# EAGLE board hub (EAGLE 8.4.3)
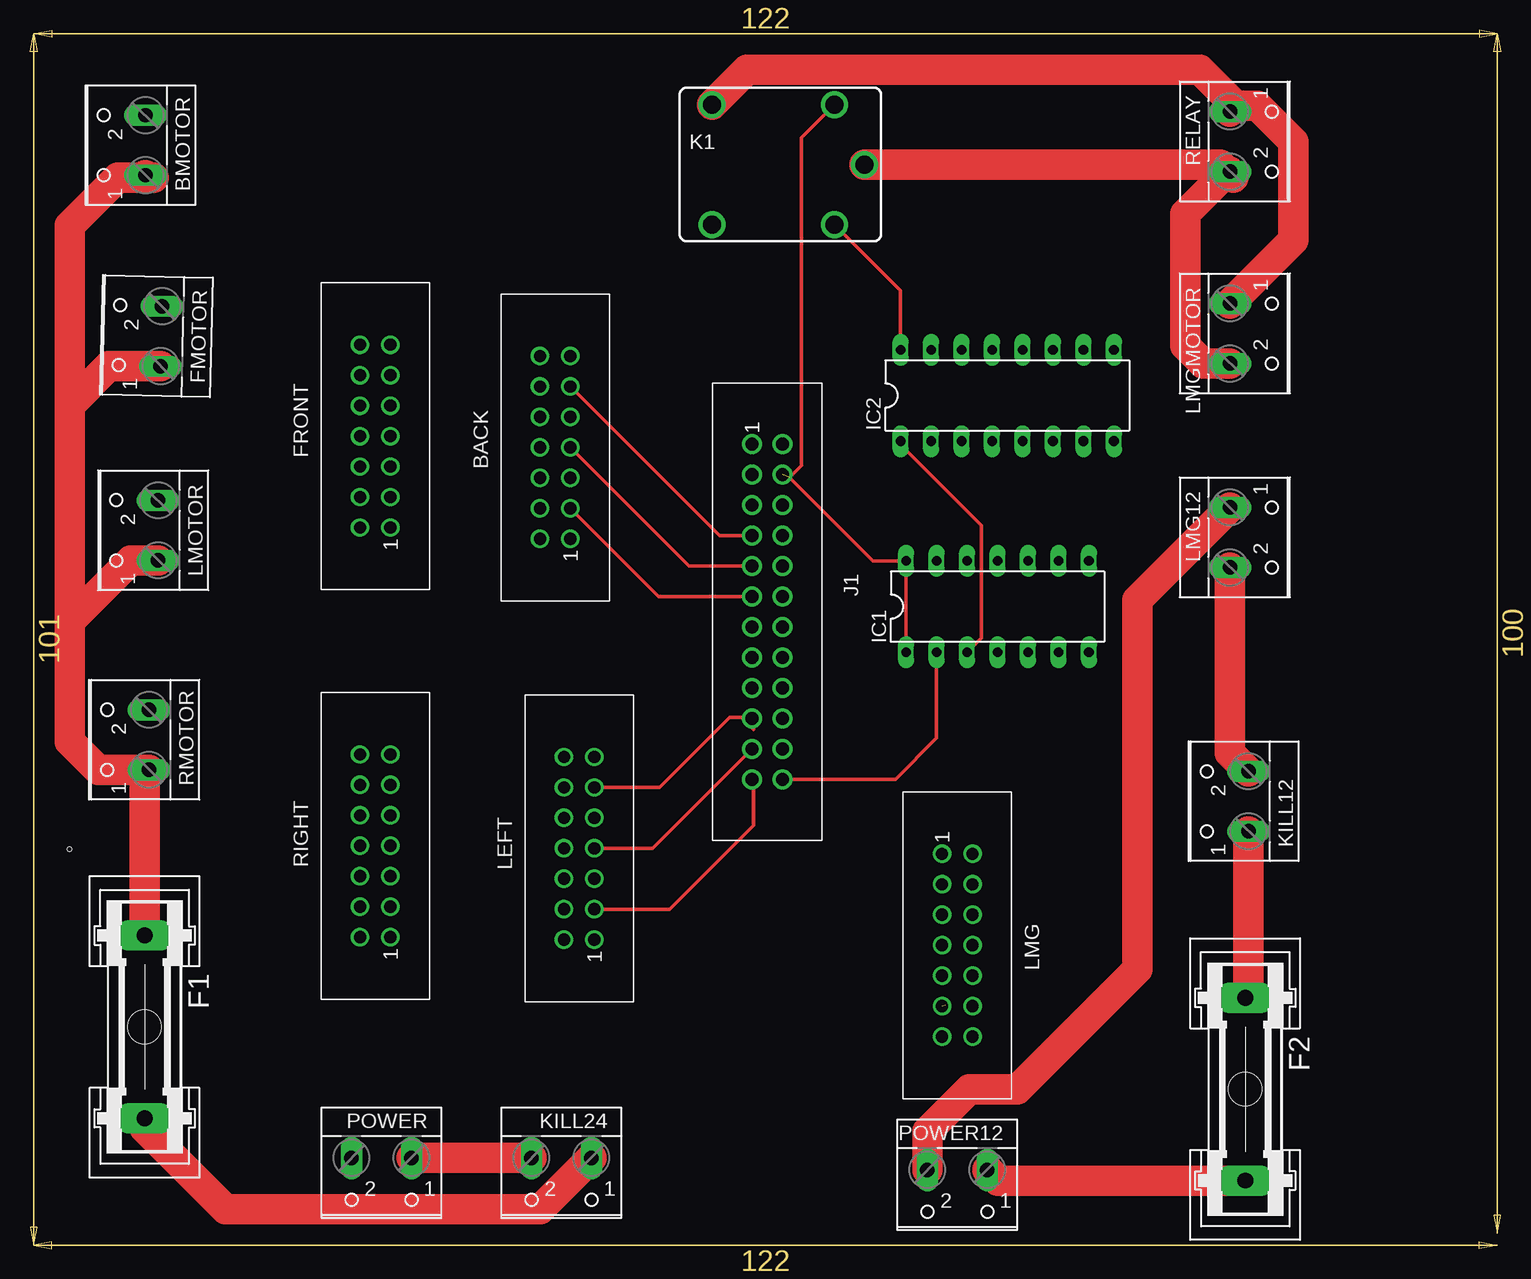
[diagram p0: board, top side]
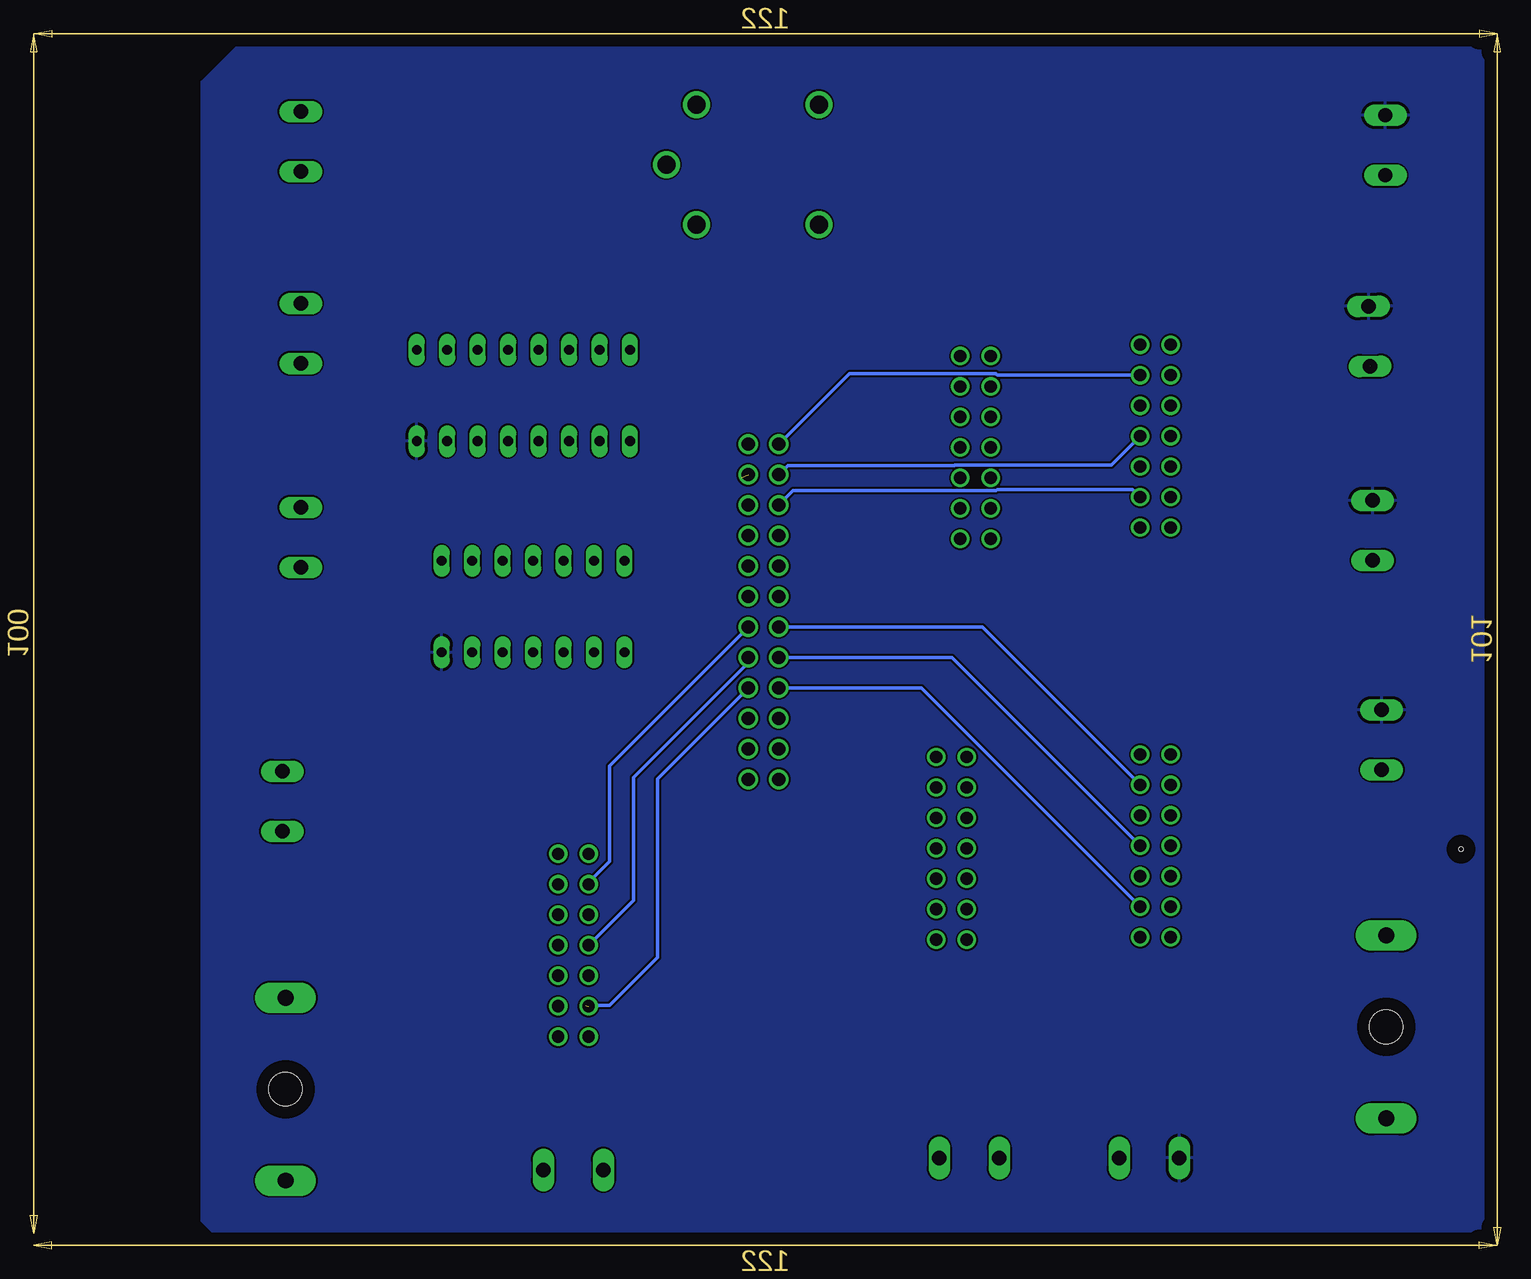
[diagram p1: board, bottom side, seen from below]

Size 122.6 x 101.6 mm. Coordinates in mm from the lower left corner, seen from the top.
Copper layers (1*16): Top 0.035mm / dielectric 1.5mm / Bottom 0.035mm
Design rules "default": minimum track width 6mil, minimum drill 0.35mm, track to track 6mil, track to pad 6mil, pad to pad 6mil, via to via 6mil, smd to smd 6mil, copper to edge 40mil, drill to drill 6mil, minimum pad ring 10mil, minimum via ring 8mil, stop-mask expansion 4mil, vias tented up to drill 0mil, thermal gap 10mil
Holes 0.35 mm at 3.3,33.3

## Footprints (pad centres in the part's own frame; a part is rotated, then mirrored left to right if it is on the bottom)
612014235121 = drill 1.02: 1 -7.62,-1.27; 2 -7.62,1.27; 3 -5.08,-1.27; 4 -5.08,1.27; 5 -2.54,-1.27; 6 -2.54,1.27; 7 0,-1.27; 8 0,1.27; 9 2.54,-1.27; 10 2.54,1.27; 11 5.08,-1.27; 12 5.08,1.27; 13 7.62,-1.27; 14 7.62,1.27
W237-102 = drill 1.194 long: 1 -2.5,-1.27; 2 2.5,-1.27
GSH15 = drill 1.321 pad 2.54 long: 1 -7.62,0; 2 7.62,0 | hole 2.794: 0,0
DIL14 = drill 0.813 long: 1 -7.62,-3.81; 2 -5.08,-3.81; 3 -2.54,-3.81; 4 0,-3.81; 5 2.54,-3.81; 6 5.08,-3.81; 7 7.62,-3.81; 8 7.62,3.81; 9 5.08,3.81; 10 2.54,3.81; 11 0,3.81; 12 -2.54,3.81; 13 -5.08,3.81; 14 -7.62,3.81
DIL16 = drill 0.813 long: 1 -8.89,-3.81; 2 -6.35,-3.81; 3 -3.81,-3.81; 4 -1.27,-3.81; 5 1.27,-3.81; 6 3.81,-3.81; 7 6.35,-3.81; 8 8.89,-3.81; 9 8.89,3.81; 10 6.35,3.81; 11 3.81,3.81; 12 1.27,3.81; 13 -1.27,3.81; 14 -3.81,3.81; 15 -6.35,3.81; 16 -8.89,3.81
61202421621 = drill 1.1: 1 -13.97,-1.27; 2 -13.97,1.27; 3 -11.43,-1.27; 4 -11.43,1.27; 5 -8.89,-1.27; 6 -8.89,1.27; 7 -6.35,-1.27; 8 -6.35,1.27; 9 -3.81,-1.27; 10 -3.81,1.27; 11 -1.27,-1.27; 12 -1.27,1.27; 13 1.27,-1.27; 14 1.27,1.27; 15 3.81,-1.27; 16 3.81,1.27; 17 6.35,-1.27; 18 6.35,1.27; 19 8.89,-1.27; 20 8.89,1.27; 21 11.43,-1.27; 22 11.43,1.27; 23 13.97,-1.27; 24 13.97,1.27
CQ1 = drill 1.5: 1 4.5,-5; 2 4.5,5; C 7,0; NC -5.7,-5; NO -5.7,5

## Placement (x,y rotation side)
BACK  [612014235121]  43.78,66.8 90 top
BMOTOR  [W237-102]  8.35,91.99 90 top
F1  [GSH15]  9.55,18.49 270 top
F2  [GSH15]  101.3,13.3 270 top
FMOTOR  [W237-102]  9.68,76.1 88.6 top
FRONT  [612014235121]  28.78,67.74 90 top
IC1  74ALS00N  [DIL14]  80.66,53.53 0 top
IC2  ULN2003AN  [DIL16]  81.47,71.13 0 top
J1  [61202421621]  61.45,53.1 270 top
K1  CQ1-12V  [CQ1]  62.55,90.39 0 top
KILL12  [W237-102]  100.3,37.3 90 top
KILL24  [W237-102]  44.3,6.3 180 top
LEFT  [612014235121]  45.78,33.38 90 top
LMG  [612014235121]  77.3,25.3 270 top
LMG12  [W237-102]  101.3,59.3 270 top
LMGMOTOR  [W237-102]  101.3,76.3 270 top
LMOTOR  [W237-102]  9.41,59.89 90 top
POWER  [W237-102]  29.3,6.3 180 top
POWER12  [W237-102]  77.3,5.3 180 top
RELAY  [W237-102]  101.3,92.3 270 top
RIGHT  [612014235121]  28.78,33.59 90 top
RMOTOR  [W237-102]  8.65,42.43 90 top

## Library data of the parts
BACK FRONT J1 LEFT LMG RIGHT = Wurth_Elektronik_Electromechanic_Wire_to_Board_Connectors_rev17b
BMOTOR FMOTOR KILL12 KILL24 LMG12 LMGMOTOR LMOTOR POWER POWER12 RELAY RMOTOR = con-wago-500; MPN: 237-102; OC_FARNELL: unknown; OC_NEWARK: 70K9898
F1 F2 = fuse; MPN: 64900001039; OC_FARNELL: 1271673; OC_NEWARK: 02P0318
IC1 = 74xx-eu
IC2 = uln-udn
K1 = relay; OC_FARNELL: unknown; OC_NEWARK: unknown

## Nets
5V: IC1.1 IC1.14 J1.4 K1.2
24V: BMOTOR.1 F1.1 FMOTOR.1 LMOTOR.1 RMOTOR.1
BIN1: BACK.3 J1.11
BIN2: BACK.11 J1.7
BPWM: BACK.7 J1.9
BRAKE: IC1.2 J1.24
COM: K1.C LMGMOTOR.2 RELAY.2
FIN1: FRONT.3 J1.5
FIN2: FRONT.11 J1.1
FPWM: FRONT.7 J1.3
GND: BMOTOR.2 FMOTOR.2 IC1.7 IC2.8 LMOTOR.2 POWER.2 RMOTOR.2
LIN1: J1.23 LEFT.3
LIN2: J1.19 LEFT.11
LMG1: J1.14 LMG.3
LMG2: J1.18 LMG.11
LMGPWM: J1.16 LMG.7
LPWM: J1.21 LEFT.7
N$1: F1.2 KILL24.1
N$3: IC1.3 IC2.1
N$4: F2.2 POWER12.1
N$6: IC2.16 K1.1
N$7: KILL12.2 LMG12.2
N$9: KILL24.2 POWER.1
N$10: K1.NC
N$11: F2.1 KILL12.1
N$13: LMG12.1 POWER12.2
N$16: J1.2
N$18: J1.6
N$19: J1.8
N$20: J1.10
N$21: J1.12
N$25: J1.20
N$26: J1.22
NO: K1.NO LMGMOTOR.1 RELAY.1
RIN1: J1.17 RIGHT.3
RIN2: J1.13 RIGHT.11
RPWM: J1.15 RIGHT.7

## Tracks (layer width: path | path; a pad name or v marks a point on that pad's centre or on a via)
5V  (1 unrouted)
  Top 0.305: IC1.1 IC1.14 70.26,57.34 63.3,64.3 64.3,65.3 64.3,92.64 K1.2
24V  (1 unrouted)
  Top 2.54: F1.1 9.55,39.56 RMOTOR.1 5.67,39.93 3.3,42.3 3.3,52.3 | 3.3,52.3 8.39,57.39 LMOTOR.1 | 3.3,52.3 3.3,70.3 | 3.3,70.3 6.57,73.57 FMOTOR.1 | 3.3,70.3 3.3,85.3 7.3,89.3 9.81,89.3 | 10.3,89.3 9.81,89.3 | 9.81,89.3 BMOTOR.1
BIN1
  Top 0.305: BACK.3 52.4,54.37 J1.11
BIN2
  Top 0.305: BACK.11 57.48,59.45 J1.7
BPWM
  Top 0.305: BACK.7 54.94,56.91 J1.9
BRAKE
  Top 0.305: IC1.2 75.58,42.58 72.13,39.13 J1.24
COM
  Top 2.54: LMGMOTOR.2 97.8,73.8 96.3,75.3 96.3,86.3 99.8,89.8 | 99.8,89.8 RELAY.2 | K1.C 99.21,90.39 99.8,89.8 | 100.3,89.3 99.8,89.8
FIN1
  Bottom 0.305: FRONT.3 30.69,63.3 41.96,63.3 42.07,63.19 58.98,63.19 J1.5
FIN2
  Bottom 0.305: FRONT.11 41.94,72.82 42.07,72.95 54.3,72.95 J1.1
FPWM
  Bottom 0.305: FRONT.7 32.46,65.33 45.49,65.33 45.52,65.3 59.41,65.3 J1.3
GND
  pour Bottom: 0.3,0.3 106.3,0.3 108.3,2.3 108.3,97.3 104.3,101.3 1.3,101.3 0.3,100.3
LIN1
  Top 0.305: LEFT.3 53.3,28.3 60.3,35.3 60.3,38.3 60.18,38.42 J1.23
LIN2
  Top 0.305: LEFT.11 52.46,38.46 58.3,44.3 59.3,44.3 60.3,43.3 60.3,44.09 J1.19
LMG1
  Bottom 0.305: J1.14 74.3,40.25 74.3,32.3 76.22,30.38 | 76.3,30.3 76.22,30.38 | 76.22,30.38 LMG.3
LMG2  (1 unrouted)
  Bottom 0.305: J1.18 70.3,39.17 70.3,24.3 74.3,20.3 76.3,20.3
LMGPWM
  Bottom 0.305: J1.16 62.72,48.88 72.3,39.3 72.3,29.03 LMG.7
LPWM
  Top 0.305: LEFT.7 51.89,33.38 J1.21
N$1
  Top 2.54: KILL24.1 42.53,3.3 16.3,3.3 9.55,10.05 F1.2
N$3
  Top 0.305: IC1.3 79.3,50.9 79.3,60.3 72.58,67.02 IC2.1
N$4
  Top 2.54: F2.2 80.69,5.68 POWER12.1
N$6
  Top 0.305: K1.1 72.58,79.86 IC2.16
N$7
  Top 2.54: LMG12.2 100.03,41.34 KILL12.2
N$9
  Top 2.54: POWER.1 KILL24.2
N$11
  Top 2.54: KILL12.1 101.57,21.19 F2.1
N$13
  Top 2.54: LMG12.1 92.3,54.07 92.3,23.3 82.3,13.3 78.3,13.3 74.8,9.8 POWER12.2
NO
  Top 2.54: LMGMOTOR.1 105.3,84.07 105.3,92.3 102.3,95.3 100.53,95.3 | 100.53,95.3 RELAY.1 | K1.NO 59.76,98.3 97.53,98.3 100.53,95.3
RIN1
  Bottom 0.305: RIGHT.3 48.29,46.75 J1.17
RIN2
  Bottom 0.305: RIGHT.11 43.21,51.83 J1.13
RPWM
  Bottom 0.305: RIGHT.7 45.76,49.3 59.3,49.3 59.31,49.29 J1.15